# EAGLE board projeto06 (EAGLE 7.6.0)

Size 73.58 x 317.39 mm. Coordinates in mm from the lower left corner, seen from the top.
Outline: 0,0 56.82,0 56.82,53.33 0,53.33 0,0
Copper layers (1*16): Top 0.035mm / dielectric 1.5mm / Bottom 0.035mm
Design rules "default": minimum track width 10mil, minimum drill 24mil, track to track 8mil, track to pad 8mil, pad to pad 8mil, via to via 8mil, smd to smd 8mil, copper to edge 40mil, drill to drill 8mil, minimum pad ring 10mil, minimum via ring 8mil, stop-mask expansion 4mil, vias tented up to drill 0mil, thermal gap 10mil

## Footprints (pad centres in the part's own frame; a part is rotated, then mirrored left to right if it is on the bottom)
LED5MM = drill 0.813 octagon: A -1.27,0; K 1.27,0
B25V = drill 0.813 long: A 2.54,0.635; E -2.54,0.635; S 0,0.635
0207/10 = drill 0.813 octagon: 1 -5.08,0; 2 5.08,0
ARDUINO_UNO = drill 1.016 pad 1.88: 0 63.5,50.8; 1 60.96,50.8; 2 58.42,50.8; 3 55.88,50.8; 3.3V 35.56,2.54; 4 53.34,50.8; 5 50.8,50.8; 5V 38.1,2.54; 6 48.26,50.8; 7 45.72,50.8; 8 41.656,50.8; 9 39.116,50.8; 10 36.576,50.8; 11 34.036,50.8; 12 31.496,50.8; 13 28.956,50.8; A0 50.8,2.54; A1 53.34,2.54; A2 55.88,2.54; A3 58.42,2.54; A4 60.96,2.54; A5 63.5,2.54; AREF 23.876,50.8; GND 26.416,50.8; GND. 43.18,2.54; GND.. 40.64,2.54; I/OREF 30.48,2.54; N/C 27.94,2.54; RESET 33.02,2.54; SCL 18.796,50.8; SDA 21.336,50.8; VIN 45.72,2.54 | hole 3.2: 66.04,7.62; 66.04,35.56; 15.24,50.8; 13.97,2.54

## Placement (x,y rotation side)
DLED Vermelho 1  [LED5MM]  5,10.08 0 top
DLED Vermelho 2  [LED5MM]  5,22.78 0 top
DLED Vermelho 3  [LED5MM]  5,35.48 0 top
DLED Vermelho 4  [LED5MM]  5,48.18 0 top
DLED Vermelho 5  [LED5MM]  5,60.88 0 top
DLED Vermelho 6  [LED5MM]  5,73.58 0 top
DLED Vermelho 7  [LED5MM]  5,86.28 0 top
DLED Vermelho 8  [LED5MM]  5,98.98 0 top
DLED Vermelho 9  [LED5MM]  5,111.68 0 top
DLED Vermelho 10  [LED5MM]  5,124.38 0 top
RpotPotenciometro  5‎Ω  [B25V]  5,276.78 0 top
RResistor 1  1k‎Ω  [0207/10]  5,137.08 0 top
RResistor 2  1k‎Ω  [0207/10]  5,149.78 0 top
RResistor 3  1k‎Ω  [0207/10]  5,162.48 0 top
RResistor 4  1k‎Ω  [0207/10]  5,175.18 0 top
RResistor 5  1k‎Ω  [0207/10]  5,187.88 0 top
RResistor 6  1k‎Ω  [0207/10]  5,200.58 0 top
RResistor 7  1k‎Ω  [0207/10]  5,213.28 0 top
RResistor 8  1k‎Ω  [0207/10]  5,225.98 0 top
RResistor 9  1k‎Ω  [0207/10]  5,238.68 0 top
RResistor 10  1k‎Ω  [0207/10]  5,251.38 0 top
UArduino Uno R3  [ARDUINO_UNO]  5,264.08 0 top

## Library data of the parts
DLED Vermelho 1-DLED Vermelho 10 RpotPotenciometro RResistor 1-RResistor 10 UArduino Uno R3 = AUTODESK_CIRCUITS_BREADBOARD

## Nets
N$1: DLED Vermelho 1.A RResistor 1.2
N$2: RResistor 1.1 UArduino Uno R3.13
N$3: DLED Vermelho 2.A RResistor 2.2
N$4: RResistor 2.1 UArduino Uno R3.12
N$5: DLED Vermelho 3.A RResistor 3.2
N$6: RResistor 3.1 UArduino Uno R3.11
N$7: DLED Vermelho 4.A RResistor 4.2
N$8: RResistor 4.1 UArduino Uno R3.10
N$9: DLED Vermelho 5.A RResistor 5.2
N$10: RResistor 5.1 UArduino Uno R3.9
N$11: DLED Vermelho 6.A RResistor 6.2
N$12: RResistor 6.1 UArduino Uno R3.8
N$13: DLED Vermelho 7.A RResistor 7.2
N$14: RResistor 7.1 UArduino Uno R3.7
N$15: DLED Vermelho 8.A RResistor 8.2
N$16: RResistor 8.1 UArduino Uno R3.6
N$17: DLED Vermelho 9.A RResistor 9.2
N$18: RResistor 9.1 UArduino Uno R3.5
N$19: DLED Vermelho 10.A RResistor 10.2
N$20: RResistor 10.1 UArduino Uno R3.4
N$21: RpotPotenciometro.A UArduino Uno R3.5V
N$22: DLED Vermelho 1.K DLED Vermelho 2.K DLED Vermelho 3.K DLED Vermelho 4.K DLED Vermelho 5.K DLED Vermelho 6.K DLED Vermelho 7.K DLED Vermelho 8.K DLED Vermelho 9.K DLED Vermelho 10.K RpotPotenciometro.E UArduino Uno R3.GND
N$23: RpotPotenciometro.S UArduino Uno R3.A2

## Tracks (layer width: path | path; a pad name or v marks a point on that pad's centre or on a via)
N$1  (1 unrouted)
N$2  (1 unrouted)
N$3  (1 unrouted)
N$4  (1 unrouted)
N$5  (1 unrouted)
N$6  (1 unrouted)
N$7  (1 unrouted)
N$8  (1 unrouted)
N$9  (1 unrouted)
N$10  (1 unrouted)
N$11  (1 unrouted)
N$12  (1 unrouted)
N$13  (1 unrouted)
N$14  (1 unrouted)
N$15  (1 unrouted)
N$16  (1 unrouted)
N$17  (1 unrouted)
N$18  (1 unrouted)
N$19  (1 unrouted)
N$20  (1 unrouted)
N$21  (1 unrouted)
N$22  (11 unrouted)
N$23  (1 unrouted)